# Altium PCB PCB2.FINAL.PcbDoc (part 1 of 2)
Units mm, origin at the board's own origin, x right, y up, seen from the top; angles counter-clockwise.
Board outline 120.4 x 83.82 mm, 2 copper layers (Top Layer, Bottom Layer); 48 components, 74 nets, 339 pads, 24 vias.
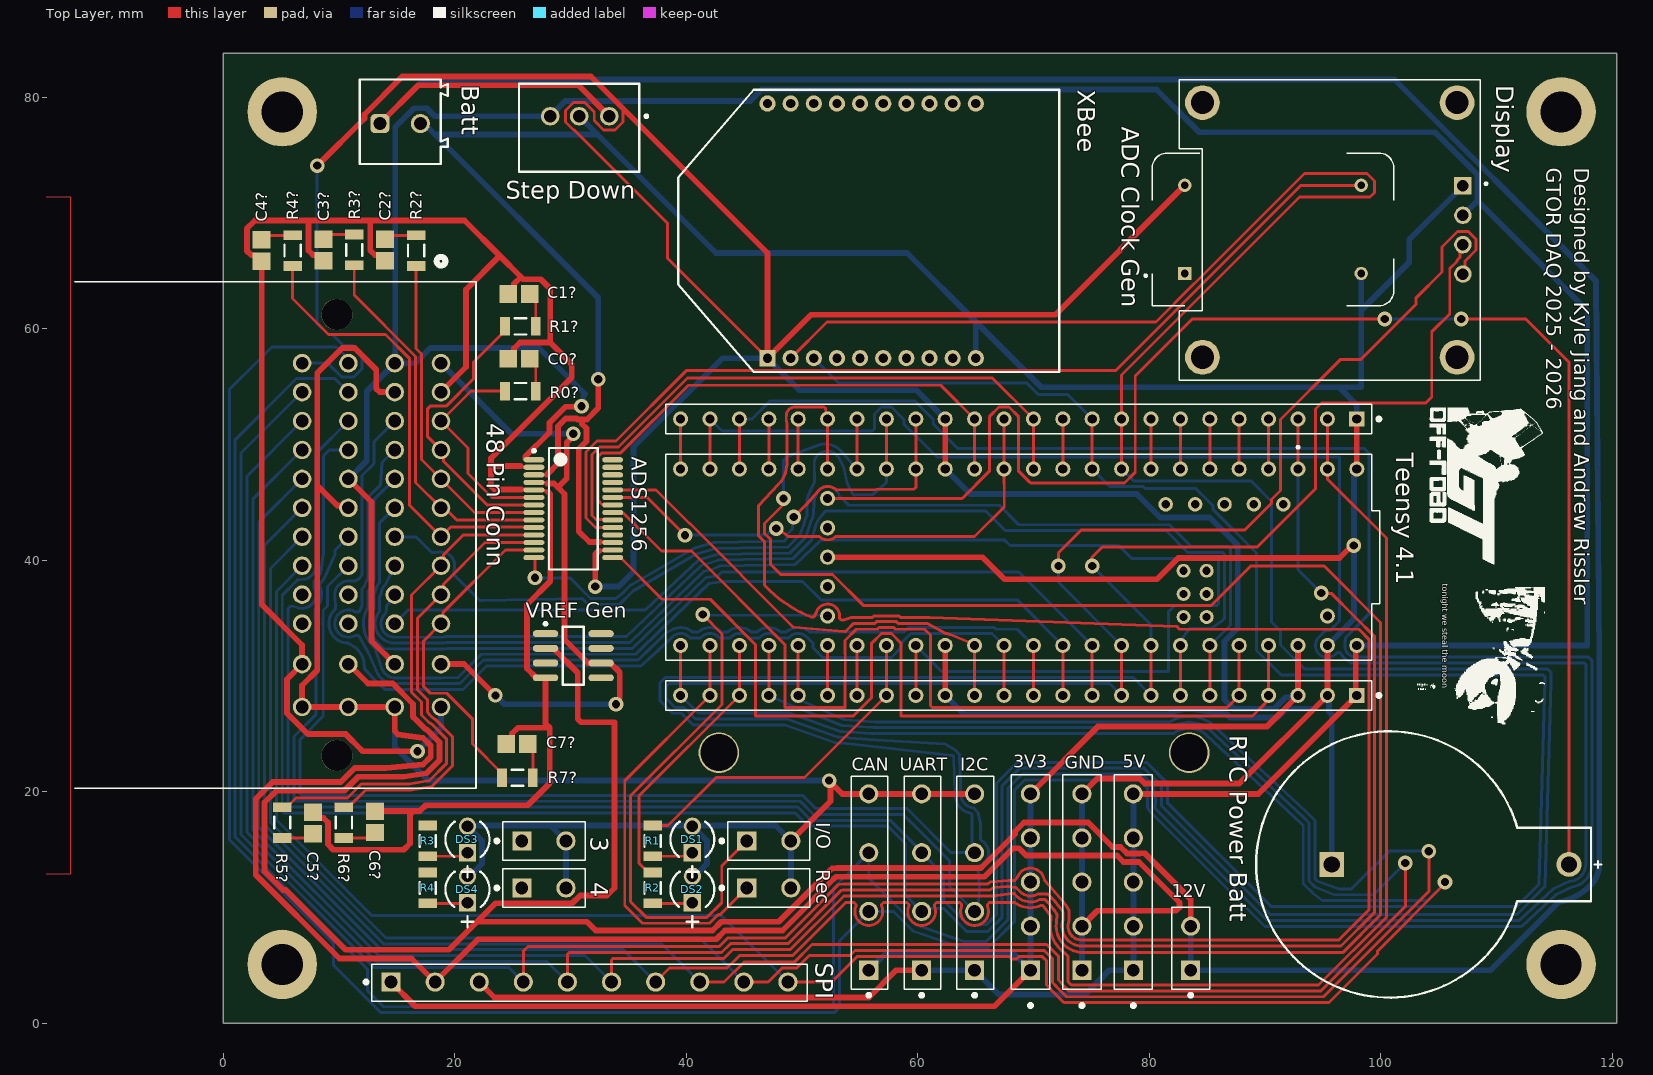
[diagram p0: Top Layer view]
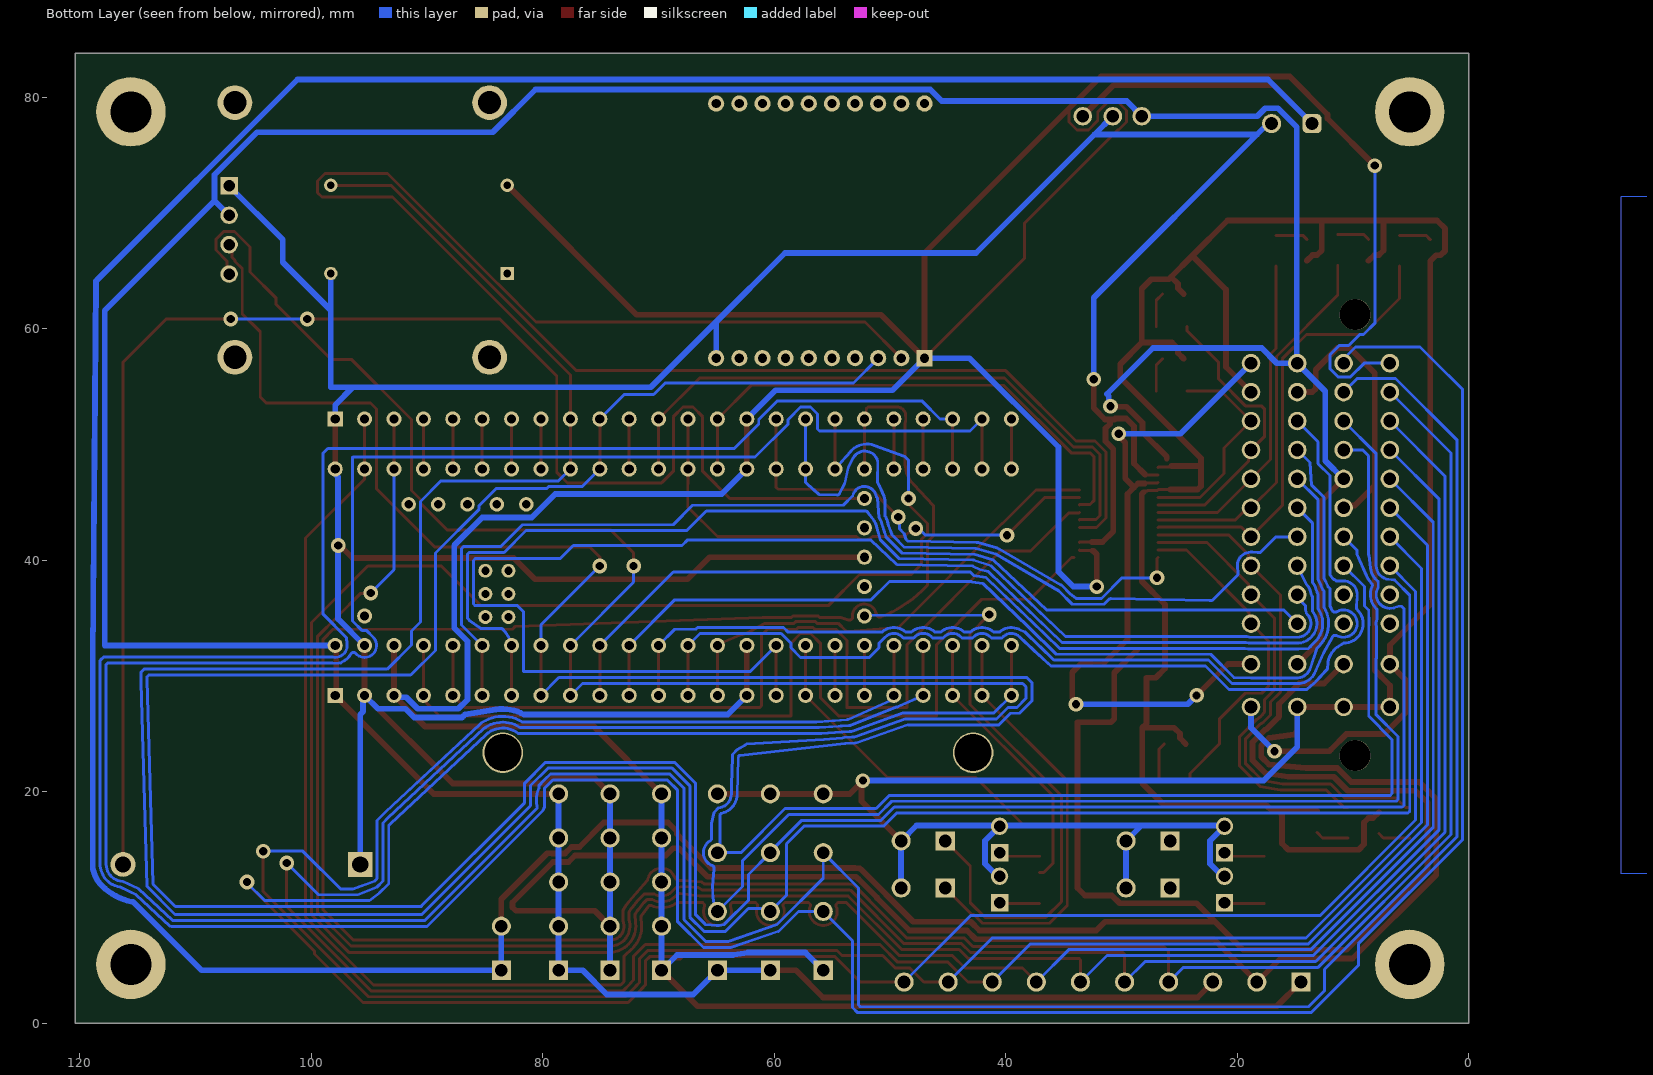
[diagram p1: Bottom Layer view, seen from below]

## Layer stack, top to bottom
Top Solder: solder mask 0.0102, Solder Resist, Dk 3.5
Top Layer: signal copper 0.0356
Dielectric 1: dielectric 0.32, FR-4, Dk 4.8
Bottom Layer: signal copper 0.0356
Bottom Solder: solder mask 0.0102, Solder Resist, Dk 3.5

## Board outline
0,0 0,83.82 120.396,83.82 120.396,0

## Design rules (kind name [scope] priority, off if disabled: settings)
Clearance [All] p1: gap=0.254 ignorepadtopadclearanceinfootprint=FALSE
ComponentClearance Ignore_48pin_Collision [InComponent('48 Pin Conn') And OnLayer('Top Layer')] p1: gap=0 collisioncheckmode=3 verticalgap=0 showdistances=FALSE donotcheckwithout3dbody=TRUE
ComponentClearance Ignore_OLED_Collision [HasFootprint('MODULE_DM-OLED096-636') vs HasFootprint('OSC_ECS-100AX-500')] p2: gap=0 collisioncheckmode=3 verticalgap=0 showdistances=FALSE donotcheckwithout3dbody=TRUE
ComponentClearance [All] p3: gap=0.254 collisioncheckmode=3 verticalgap=0.254 showdistances=FALSE
HoleSize [All] p1: absolutevalues=TRUE maxlimit=3.6 minlimit=0.025 maxpercent=80.000 minpercent=20.000
PolygonConnect [All] p1: connectstyle=Relief reliefconductorwidth=0.254 reliefentries=4 polygonreliefangle="90 Angle" airgapwidth=0.254
RoutingVias [All] p1: holewidth=0.711 width=1.27 viastyle="Through Hole" minholewidth=0.711 minwidth=1.27 maxholewidth=0.711 maxwidth=1.27
SolderMaskExpansion [All] p1: expansion=0.102 istentingtop=FALSE
SupplyNets "Schematic Supply Nets" [InNet('GND')] p1: voltage=0.000
Width [All] p1: maxlimit=0.5 minlimit=0.254 preferedwidth=0.254 minimp=50.000000 maximp=50.000000 favimp=50.000000
28 further rules are at their usual default settings.

## Classes and differential pairs
component class MainSchematic.2: "ADC Clock Gen" ADS1256 "RTC power batt" "Step Down" "Teensy 4.1" "VREF Gen" XBee
component class Filters.2: C0? C1? C2? C3? C4? C5? C6? C7? R0? R1? R2? R3? R4? R5? R6? R7?
component class 48PinConnector: 3 3V3 4 5V 12V "48 Pin Conn" Batt CAN Display DS1 DS2 DS3 DS4 GND I2C I/O R1 R2 R3 R4 Rec SPI UART

## Components (designator, comment, footprint, x,y, rotation, side; value= is the part's Value field where it differs from the comment)
1 "282837-4" TE_282837-4#1 97.917,28.321 r180 top
2 "282837-4" TE_282837-4#1 97.917,52.197 r180 top
3 "282837-4" TE_282837-4#2 25.781,15.748 r0 top (schematic designator "Btn 3")
3V3 "282837-4" TE_282837-4#3 69.723,4.572 r90 top
4 "282837-4" TE_282837-4#2 25.781,11.684 r0 top (schematic designator "Btn 4")
5V "282837-4" TE_282837-4#3 78.613,4.572 r90 top
12V "282837-4" TE_282837-4#2 83.566,4.572 r90 top
"48 Pin Conn" "366380003" CONN_36638-0003_MOL 18.796,57.023 r270 top (schematic designator J?)
"ADC Clock Gen" "MCO-1510A" OSC_ECS-100AX-500 90.678,68.58 r0 top (schematic designator "ADC Clock Generator")
ADS1256 "ADS1256IDBTG4" TI-DB28_L 30.226,44.45 r0 top
Batt "691214110002S" 691214110002S 15.268,77.874 r0 top
C0? "VJ0805Y682KXAMT" CAPC2013X145X48ML20T23 25.527,57.404 r0 top
C1? "VJ0805Y682KXAMT" CAPC2013X145X48ML20T23 25.527,62.992 r0 top
C2? "VJ0805Y682KXAMT" CAPC2013X145X48ML20T23 13.97,66.802 r90 top
C3? "VJ0805Y682KXAMT" CAPC2013X145X48ML20T23 8.636,66.802 r90 top
C4? "VJ0805Y682KXAMT" CAPC2013X145X48ML20T23 3.302,66.766 r90 top
C5? "VJ0805Y682KXAMT" CAPC2013X145X48ML20T23 7.747,17.308 r270 top
C6? "VJ0805Y682KXAMT" CAPC2013X145X48ML20T23 13.081,17.399 r270 top
C7? "VJ0805Y682KXAMT" CAPC2013X145X48ML20T23 25.364,24.13 r0 top
CAN "282837-4" TE_282837-4#4 55.753,4.572 r90 top
Display "DM-OLED096-636" MODULE_DM-OLED096-636 95.582,68.531 r270 top
DS1 "304090041" LED-2P-2.28-3MM_A 40.513,15.875 r90 top
DS2 "304090041" LED-2P-2.28-3MM_A 40.513,11.557 r90 top
DS3 "304090041" LED-2P-2.28-3MM_A 21.082,15.875 r90 top
DS4 "304090041" LED-2P-2.28-3MM_A 21.082,11.557 r90 top
GND "282837-4" TE_282837-4#3 74.168,4.572 r90 top
I2C "282837-4" TE_282837-4#4 64.897,4.572 r90 top
I/O "282837-4" TE_282837-4#2 45.212,15.748 r0 top
R0? "RC1206FR-10750RL" RESC3116X65X40LL10T20 25.654,54.61 r0 top
R1 "RC1206FR-10750RL" RESC3116X65X40LL10T20 37.084,15.748 r270 top
R1? "RC1206FR-10750RL" RESC3116X65X40LL10T20 25.654,60.198 r0 top
R2 "RC1206FR-10750RL" RESC3116X65X40LL10T20 37.084,11.684 r270 top
R2? "RC1206FR-10750RL" RESC3116X65X40LL10T20 16.637,66.747 r90 top
R3 "RC1206FR-10750RL" RESC3116X65X40LL10T20 17.653,15.748 r270 top
R3? "RC1206FR-10750RL" RESC3116X65X40LL10T20 11.303,66.802 r90 top
R4 "RC1206FR-10750RL" RESC3116X65X40LL10T20 17.653,11.684 r270 top
R4? "RC1206FR-10750RL" RESC3116X65X40LL10T20 5.969,66.747 r90 top
R5? "RC1206FR-10750RL" RESC3116X65X40LL10T20 5.08,17.327 r270 top
R6? "RC1206FR-10750RL" RESC3116X65X40LL10T20 10.414,17.327 r270 top
R7? "RC1206FR-10750RL" RESC3116X65X40LL10T20 25.4,21.209 r0 top
Rec "282837-4" TE_282837-4#2 45.212,11.684 r0 top
"RTC Power Batt" "101" FP-101-MFG 103.683,13.716 r0 top (schematic designator "RTC power batt")
SPI "282837-4" TE_282837-4#5 14.478,3.556 r0 top (schematic designator J?)
"Step Down" "OKI-78SR-5/1.5-W36-C" MURA-OKI-78SR-3 30.734,78.359 r180 top (schematic designator "Step Down Circuit")
"Teensy 4.1" "DEV-16771" MODULE_DEV-16771 68.707,40.259 r180 top
UART "282837-4" TE_282837-4#4 60.325,4.572 r90 top
"VREF Gen" "ADR4550ARZ" ADI-R-8_N 30.226,31.75 r0 top (schematic designator "Analog VREF Generator")
XBee "XBP9B-DPST-001" DIP2200W51P200L3294H279Q20P 55.753,68.453 r90 top

## Footprints (in the part's own frame and the unit in brackets; to place one, negate y for a bottom-side part, rotate by r counter-clockwise, add the part's x,y. Pads: shape width x height; smd on the part's side, far side on the other; paste and mask are expansions set on the pad)
691214110002S [mm]
  rrect50% 1.65x1.65 hole 1.1: 1(-1.75,-0.15)
  round 1.65 hole 1.1: 2(1.75,-0.15)
  silkscreen extent -3.5,-3.65 4.1,3.65, body extent -3.5,-3.65 4.1,3.65, height 9.15
ADI-R-8_N [mm] "SOIC, 8-Leads, Body 4.9x3.9mm, Pitch 1.27mm, IPC Medium Density"
  oval 2.2x0.6 smd: 1(-2.4,1.905) 2(-2.4,0.635) 3(-2.4,-0.635) 4(-2.4,-1.905) 5(2.4,-1.905) 6(2.4,-0.635) 7(2.4,0.635) 8(2.4,1.905)
  silkscreen extent -2.52,-2.5 0.9,2.88, body extent -2,-2.5 2,2.5, height 1.75
CAPC2013X145X48ML20T23 [mm] "Chip Capacitor, 2-Leads, Body 2.00x1.25mm, IPC Low Density"
  rect 1.5x1.55 smd: 1(-0.925,0) 2(0.925,0)
  body extent -1.1,-0.72 1.1,0.72, height 1.45
CONN_36638-0003_MOL [mil]
  round 63 / inner round 60 / far side round 63 hole 43 paste-99999 mask+0: A1(0,0) A2(0,-157.48) A3(0,-314.96) A4(0,-472.44) B1(98.43,0) B2(98.43,-157.48) B3(98.43,-314.96) B4(98.43,-472.44) C1(196.85,0) C2(196.85,-157.48) C3(196.85,-314.96) C4(196.85,-472.44) D1(295.28,0) D2(295.28,-157.48) D3(295.28,-314.96) D4(295.28,-472.44) E1(393.7,0) E2(393.7,-157.48) E3(393.7,-314.96) E4(393.7,-472.44) F1(492.13,0) F2(492.13,-157.48) F3(492.13,-314.96) F4(492.13,-472.44) G1(590.55,0) G2(590.55,-157.48) G3(590.55,-314.96) G4(590.55,-472.44) H1(688.98,0) H2(688.98,-157.48) H3(688.98,-314.96) H4(688.98,-472.44) J1(787.4,0) J2(787.4,-157.48) J3(787.4,-314.96) J4(787.4,-472.44) K1(885.83,0) K2(885.83,-157.48) K3(885.83,-314.96) K4(885.83,-472.44) L1(1023.62,0) L2(1023.62,-157.48) L3(1023.62,-314.96) L4(1023.62,-472.44) M1(1169.29,0) M2(1169.29,-157.48) M3(1169.29,-314.96) M4(1169.29,-472.44)
  round 106 / inner round 60 / far side round 106 hole 106 unplated paste-99999 mask+0: MOUNT1(-165.35,-354.33) MOUNT2(1334.65,-354.33)
  Multi-Layer lines w1: 1441.15,-2098.83 1441.15,-1377.9 1736.15,-1377.9 1736.15,-1259.9 -566.85,-1259.9 -566.85,-1377.9 -271.85,-1377.9 -271.85,-2098.83 1441.15,-2098.83
  silkscreen extent -362,-1245 1446,119
DIP2200W51P200L3294H279Q20P [mm]
  rect 1.4x1.4 / inner round 1.4 / far side rect 1.4x1.4 hole 0.8 mask+0.102: 1(-11,8.75)
  round 1.4 hole 0.8 mask+0.102: 2(-11,6.75) 3(-11,4.75) 4(-11,2.75) 5(-11,0.75) 6(-11,-1.25) 7(-11,-3.25) 8(-11,-5.25) 9(-11,-7.25) 10(-11,-9.25) 11(11,-9.25) 12(11,-7.25) 13(11,-5.25) 14(11,-3.25) 15(11,-1.25) 16(11,0.75) 17(11,2.75) 18(11,4.75) 19(11,6.75) 20(11,8.75)
  silkscreen extent -12.19,-16.47 12.19,16.47, body extent -12.19,-16.47 12.19,29.17, height 7.67
FP-101-MFG [mm]
  rect 2.145x2.145 hole 1.395 paste-2539.97 mask+0: 1(-7.925,0)
  round 2.145 hole 1.395 paste-2539.97 mask+0: 2(12.565,0)
  silkscreen extent -14.46,-11.5 15.37,11.5, body extent -14.57,-11.61 14.57,11.61, height 0.25
LED-2P-2.28-3MM_A [mm] "LED, 2-Leads, Dia 3mm, Pitch 2.28mm"
  rect 1.5x1.5 hole 1: 1(-1.14,0)
  round 1.5 hole 1: 2(1.14,0)
  silkscreen extent -3.29,-1.9 1.52,1.9, body extent -1.9,-1.91 1.52,1.91, height 5.3
MODULE_DEV-16771 [mm]
  round 1.308 hole 0.8: 0(-26.67,-7.62) 1(-24.13,-7.62) 2(-21.59,-7.62) 3(-19.05,-7.62) 3.3V_1(6.35,-7.62) 3.3V_2(-24.13,7.62) 3.3V_3(16.51,-2.54) 4(-16.51,-7.62) 5(-13.97,-7.62) 6(-11.43,-7.62) 7(-8.89,-7.62) 8(-6.35,-7.62) 9(-3.81,-7.62) 10(-1.27,-7.62) 11(1.27,-7.62) 12(3.81,-7.62) 13(3.81,7.62) 14(1.27,7.62) 15(-1.27,7.62) 16(-3.81,7.62) 17(-6.35,7.62) 18(-8.89,7.62) 19(-11.43,7.62) 20(-13.97,7.62) 21(-16.51,7.62) 22(-19.05,7.62) 23(-21.59,7.62) 24(8.89,-7.62) 25(11.43,-7.62) 26(13.97,-7.62) 27(16.51,-7.62) 28(19.05,-7.62) 29(21.59,-7.62) 30(24.13,-7.62) 31(26.67,-7.62) 32(29.21,-7.62) 33(29.21,7.62) 34(26.67,7.62) 35(24.13,7.62) 36(21.59,7.62) 37(19.05,7.62) 38(16.51,7.62) 39(13.97,7.62) 40(11.43,7.62) 41(8.89,7.62) GND1(-29.21,-7.62) GND2(6.35,7.62) GND3(-26.67,7.62) GND4(16.51,0) ON/OFF(16.51,5.08) PROGRAM(16.51,2.54) VBAT(16.51,-5.08) VIN(-29.21,7.62) VUSB(-26.67,5.08)
  round 1.258 hole 0.75: 5V(-22.86,-4.57) D+(-17.78,-4.57) D-(-20.32,-4.57) USB_GND1(-15.24,-4.57) USB_GND2(-12.7,-4.57)
  round 1.208 hole 0.7: GND5(-14.24,3.17) LED(-16.24,3.17) R+(-16.24,5.17) R-(-14.24,5.17) T+(-14.24,1.17) T-(-16.24,1.17)
  silkscreen extent -31.18,-9.6 30.48,8.89, body extent -31.18,-8.89 30.48,8.89, height 7.15
MODULE_DM-OLED096-636 [mm]
  rect 1.508x1.508 / inner round 1.508 / far side rect 1.508x1.508 hole 1: 1(-3.81,11.5)
  round 1.508 hole 1: 2(-1.27,11.5) 3(1.27,11.5) 4(3.81,11.5)
  round 3 hole 2: S1(-11,11) S2(11,11) S3(11,-11) S4(-11,-11)
  silkscreen extent -13,-13 13,13.6
MURA-OKI-78SR-3 [mm] "THMT, 3-Leads, Body 10.4x7.6mm"
  round 1.6 hole 1.1: 1(-2.6,0) 2(0,0) 3(2.5,0)
  silkscreen extent -5.92,-2.8 5.2,4.8, body extent -5.2,-2.8 5.2,4.8, height 16.5
OSC_ECS-100AX-500 [mm]
  rect 1.158x1.158 hole 0.65: 1(-7.62,-3.81)
  round 1.158 hole 0.65: 7(7.62,-3.81) 8(7.62,3.81) 14(-7.62,3.81)
  silkscreen extent -11.1,-6.6 10.43,6.6
RESC3116X65X40LL10T20 [mm] "Chip Resistor, 2-Leads, Body 3.10x1.60mm, IPC High Density"
  rect 0.85x1.6 smd: 1(-1.325,0) 2(1.325,0)
  silkscreen extent -0.5,-0.7 0.5,0.7, body extent -1.6,-0.85 1.6,0.85, height 0.65
TE_282837-4#1 [mm]
  rect 1.308x1.308 / inner round 1.308 / far side rect 1.308x1.308 hole 0.8: 1(0,0)
  round 1.308 hole 0.8: 2(2.54,0) 3(5.08,0) 4(7.62,0) 5(10.16,0) 6(12.7,0) 7(15.24,0) 8(17.78,0) 9(20.32,0) 10(22.86,0) 11(25.4,0) 12(27.94,0) 13(30.48,0) 14(33.02,0) 15(35.56,0) 16(38.1,0) 17(40.64,0) 18(43.18,0) 19(45.72,0) 20(48.26,0) 21(50.8,0) 22(53.34,0) 23(55.88,0) 24(58.42,0)
  silkscreen extent -2.05,-1.27 59.69,1.27
TE_282837-4#2 [mm]
  rect 1.65x1.65 / inner round 1.65 / far side rect 1.65x1.65 hole 1.1: 1(0,0)
  round 1.65 hole 1.1: 2(3.81,0)
  silkscreen extent -2.31,-1.65 5.46,1.65
TE_282837-4#3 [mm]
  rect 1.65x1.65 / inner round 1.65 / far side rect 1.65x1.65 hole 1.1: 1(0,0)
  round 1.65 hole 1.1: 2(3.81,0) 3(7.62,0) 4(11.43,0) 5(15.24,0)
  silkscreen extent -3.2,-1.65 16.89,1.65
TE_282837-4#4 [mm]
  rect 1.65x1.65 / inner round 1.65 / far side rect 1.65x1.65 hole 1.1: 1(0,0)
  round 1.65 hole 1.1: 2(5.08,0) 3(10.16,0) 4(15.24,0)
  silkscreen extent -2.31,-1.65 16.76,1.52, body extent -1.65,-1.65 16.76,1.52, height 0.25
TE_282837-4#5 [mm]
  rect 1.65x1.65 / inner round 1.65 / far side rect 1.65x1.65 hole 1.1: 1(0,0)
  round 1.65 hole 1.1: 2(3.81,0) 3(7.62,0) 4(11.43,0) 5(15.24,0) 6(19.05,0) 7(22.86,0) 8(26.67,0) 9(30.48,0) 10(34.29,0)
  silkscreen extent -2.31,-1.65 35.94,1.52
TI-DB28_L [mm] "SOP, 28-Leads, Body 10.2x5.3mm, Pitch 0.65mm, IPC High Density"
  oval 1.8x0.45 smd: 1(-3.4,4.225) 2(-3.4,3.575) 3(-3.4,2.925) 4(-3.4,2.275) 5(-3.4,1.625) 6(-3.4,0.975) 7(-3.4,0.325) 8(-3.4,-0.325) 9(-3.4,-0.975) 10(-3.4,-1.625) 11(-3.4,-2.275) 12(-3.4,-2.925) 13(-3.4,-3.575) 14(-3.4,-4.225) 15(3.4,-4.225) 16(3.4,-3.575) 17(3.4,-2.925) 18(3.4,-2.275) 19(3.4,-1.625) 20(3.4,-0.975) 21(3.4,-0.325) 22(3.4,0.325) 23(3.4,0.975) 24(3.4,1.625) 25(3.4,2.275) 26(3.4,2.925) 27(3.4,3.575) 28(3.4,4.225)
  silkscreen extent -3.52,-5.25 2.1,5.25, body extent -2.8,-5.25 2.8,5.25, height 2

## Part data
1 2 3 3V3 4 5V 12V CAN GND I2C I/O Rec SPI UART: "4 Position Wire to Board Terminal Block Horizontal with Board 0.200 (5.08mm) Through Hole", Package=None, Availability="In Stock", Check_prices=https://www.snapeda.com/parts/282837-4/TE+Connectivity+AMP+Connectors/view-part/?ref=eda, EU_RoHS_Compliance="Compliant with Exemptions", MF="TE Connectivity", MP=282837-4, Price=None, Purchase-URL=https://pricing.snapeda.com/search/part/282837-4/?ref=eda, SnapEDA_Link=https://www.snapeda.com/parts/282837-4/TE+Connectivity+AMP+Connectors/view-part/?ref=snap
"48 Pin Conn": "2.50mm, 3.50mm CMC Header, Right-Angle, 48 Position, 1 Port, Brown, Peg,  Lead-Free", Manufacturer_Name="Molex Connector Corporation", Copyright="Copyright (C) 2025 Ultra Librarian. All rights reserved.", Manufacturer_Part_Number=366380003, RefDes=RefDes, Type=Type
"ADC Clock Gen": library part ECS-100AX-500, "Oscillator  14-DIP, 4 Leads (Full Size, Metal Can)", Package=None, Availability=Unavailable, MP=ECS-100AX-500, Price=None
ADS1256: library part CMP-0003-00153-1, "24-Bit, 30 kSPS Very Low Noise Delta-Sigma ADC with Multiplexer, -40 to 85 degC, 28-pin SOP (DB28), Green (RoHS & no Sb/Br)", Analog Voltage AV/DD(Max)(V)=5.25, Analog Voltage AV/DD(Min)(V)=4.75, Manufacturer="Texas Instruments", # Input Channels=8, Architecture=Delta-Sigma, Code_JEDEC=MO-150, ComponentLink1Description="Manufacturer URL", ComponentLink1URL=http://www.ti.com/, ComponentLink2Description=Datasheet, ComponentLink2URL=http://www.ti.com/general/docs/lit/getliterature.tsp?genericPartNumber=ADS1256&fileType=pdf, ComponentLink3Description="Package Specification", ComponentLink3URL=http://www.ti.com/lit/ml/msso002e/msso002e.pdf, DatasheetVersion=SBAS288J, Digital Supply(Max)(V)=3.6, Digital Supply(Min)(V)=1.8, Eco-Plan="Green (RoHS & no Sb/Br)", Interface="Serial SPI", Mounting Technology="Surface Mount", PackageDescription="28-Pin Plastic Small Outline, Body 10.2 X 5.3 mm, Pitch 0.65 mm", PackageReference=DB28, PackageVersion="4040065/E, 12/2001", PartNumber=ADS1256IDBTG4, Resolution(Bits)=24, Sample Rate (max)(SPS)=30k, SubFamily="Precision ADC (<=10MSPS)"
Batt: library part CMP-1502-02465-2, Current Rating=10A, Max Operating Temperature=120°C, Min Operating Temperature=-30°C, Voltage Rating=300V, Contact Material="Nickel, Tin", Height=9.2mm, Lead Pitch=3.5mm, NexarPartId=94172715, Number of Contacts=2, Number of Pins=2, Number of Rows=1, Packaging=Box
C0? C1? C2? C3? C4? C5? C6? C7?: library part CMP-2007-03205-1, Manufacturer=Vitramon, Part Number=VJ0805Y682KXAMT
Display: "0.96â€ 128 X 64 MONOCHROME GRAPHIC OLED DISPLAY MODULE - I2C", Package=Package, Check_prices=https://www.snapeda.com/parts/DM-OLED096-636/Display+Module/view-part/?ref=eda, MF="Display Module", MP=DM-OLED096-636, SnapEDA_Link=https://www.snapeda.com/parts/DM-OLED096-636/Display+Module/view-part/?ref=snap
DS1 DS2 DS3 DS4: library part CMP-007-00007-2, "Red LED, 80 mW, 30 mA, -25 to 85 degC, 2-Pin THD", Manufacturer="Shenzhen CGX", Package Description="2-Pin Through Hole Device, Dia 3 mm, Pitch 2.28 mm", Case/Package=304090041, Datasheet URL=http://datasheet.octopart.com/304090041-Chengguangxing-datasheet-62330656.pdf, Datasheet Version=Sep-14, Manufacturer URL=http://szcgx.com/, Mounting Technology=TH, Package Reference=304090041, RoHS Compliant=Unknown
R0? R1 R1? R2 R2? R3 R3? R4 R4? R5? R6? R7?: library part CMP-2003-04964-1, Manufacturer=Yageo, Part Number=RC1206FR-10750RL
"RTC Power Batt": library part CMP-19636-000018-1, "BATTERY HOLDER COIN 20MM PC PIN", Max Operating Temperature=145°C, Min Operating Temperature=-50°C, Package Quantity=1, Body Material=PBT, Contact Plating=Tin, Lead Free="Lead Free", Material=Steel, Mount="Through Hole", Number of Batteries=1, Number of Cells=1, Packaging=Bag, REACH SVHC="No SVHC", series=-, Termination="PC Pin"
"Step Down": library part CMP-2000-05274-1, "Non-Isolated DC/DC Converter, 7.5 W, 7 to 36 V, 1.5 A, -40 to 85 degC, 3-Pin THD, RoHS", Current - Output (Max)=1.5A, Manufacturer=Murata, Operating Temperature=-40degC~85degC, Package / Case=3-SIPModule, Power (Watts) - Manufacture Series=8W, Voltage - Input (Max)=36V, Voltage - Input (Min)=7V, Voltage - Isolation=-, Voltage - Output 1=5V, Applications=ITE(Commercial), Category=PowerSupplies-BoardMount, Datasheet URL=https://datasheet.ciiva.com/8006/1790439-8006672.pdf, Datasheet Version=Oct-13, Efficiency=90.5%, Family=DCDCConverters, Features=SCP, Manufacturer URL=http://www.murata.com/, Mounting Type=ThroughHole, Number of Outputs=1, Packaging=Tube, Power (Watts) - Max=8W, series=Okami™OKI-78SR, Size / Dimension="0.41\"Lx0.30\"Wx0.65\"H(10.4mmx7.6mmx16.5mm)", Type=LinearRegulatorReplacement, Voltage - Output 2=-, Voltage - Output 3=-
"Teensy 4.1": library part CMP-003-000000-1, "RT1062 Teensy 4.1 series ARM?Cortex?M7 MPU Embedded Evaluation Board", Package=None, Check_prices=https://www.snapeda.com/parts/DEV-16771/SparkFun+Electronics/view-part/?ref=eda, MF="SparkFun Electronics", MP=DEV-16771, SnapEDA_Link=https://www.snapeda.com/parts/DEV-16771/SparkFun+Electronics/view-part/?ref=snap
"VREF Gen": library part CMP-0784-00194-1, "Ultralow Noise, High Accuracy Voltage Reference, 5 V Output, 3 to 15 V Supply, Industrial, 8-pin SOIC (R-8), Tube", Manufacturer="Analog Devices", Operating Temp Range="-40 to 125 degC", Code_JEDEC=MS-012-AA, ComponentLink1Description="Manufacturer URL", ComponentLink1URL=http://www.analog.com/en/index.html, ComponentLink2Description=Datasheet, ComponentLink2URL=http://www.analog.com/static/imported-files/data_sheets/ADR4520_4525_4530_4533_4540_4550.pdf, ComponentLink3Description="Package Specification", ComponentLink3URL=http://www.analog.com/static/imported-files/packages/PKG_PDF/SOIC_Narrow%20(R)/R_8.pdf, ComponentLink4Description="URL Link1", ComponentLink4URL="Product URL:http://www.analog.com/en/special-linear-functions/voltage-references/adr4550/products/product.html", DatasheetVersion="Rev. 0", Max V Supply (V)=15, Min V Supply (V)=3, Mounting Technology="Surface Mount", PackageDescription="8-Pin Standard Small Outline Package, Body 4.9 x 3.9 mm, Pitch 1.27 mm", PackageReference=R-8, PackageVersion="060506-A, 06/2006", Packing=Tube, PartNumber=ADR4550ARZ, Ref Out TC (ppm/C)=4, Vout=5V
XBee: "General ISM < 1GHz - Transceiver Module 900MHz Antenna Not Included, RP-SMA Through Hole", Package="Module Digi International", Check_prices=https://www.snapeda.com/parts/XBP9B-DPST-001/Digi+International/view-part/?ref=eda, MF="Digi International", MP=XBP9B-DPST-001, SnapEDA_Link=https://www.snapeda.com/parts/XBP9B-DPST-001/Digi+International/view-part/?ref=snap

## Free pads (board coordinates)
  round 6 hole 3.55: 6(5.08,78.74) 7(5.08,5.08) 8(115.57,78.74) 9(115.57,5.08)
  round 3.5 hole 3.2: 13(42.799,23.368) 14(83.439,23.368)

## Via types
v1: diameter 1.27, hole 0.711, Top Layer to Bottom Layer, 24 vias

## Nets (pads, with @x,y where several pads share a name; then routed paths per layer and width w, separated by ;. In a path a pad name is that pad's centre, name@x,y a point inside that pad or via, vN(x,y) a via of type N, cw(c..) or ccw(c..) an arc to the next point about the centre after c; other vN are vias at no path point)
GND: 1.2 1.15 2.1 3.2 4.2 "48 Pin Conn.B2" "48 Pin Conn.F3" "48 Pin Conn.M2" "48 Pin Conn.M3" "48 Pin Conn.M4" "ADC Clock Gen.7" "RTC Power Batt.1" "Step Down.2" "Teensy 4.1.GND1" "Teensy 4.1.GND2" "Teensy 4.1.GND3" "Teensy 4.1.GND4" ADS1256.3 ADS1256.17 Batt.2 CAN.4 Display.1 DS1.2 DS2.2 DS3.2 DS4.2 GND.1 GND.2 GND.3 GND.4 GND.5 I2C.4 I/O.2 Rec.2 SPI.2 UART.4 XBee.10 | length 634.8
  Top Layer w0.254: ADS1256.3@26.826,47.375 27.94,47.375 ; 32.533,41.562 33.588,41.562 ADS1256.17@33.626,41.525
  Top Layer w0.5: 10.796,44.523 10.586,44.734 9.83,44.734 8.1,46.464 ; 14.796,54.523 13.501,54.523 13.208,54.816 13.208,56.455 11.336,58.327 10.256,58.327 8.1,56.171 8.1,46.464 ; 27.94,47.375 28.915,48.35 28.915,51.571 29.582,52.238 30.525,52.238 30.599,52.165 30.988,52.165 ; v1(32.385,55.626) 32.385,53.149 31.401,52.165 30.988,52.165 ; 32.533,41.562 31.62,41.562 30.698,42.485 30.698,49.608 31.365,50.275 31.365,51.399 30.988,51.776 30.988,52.165 ; I/O.2@49.022,15.748 52.451,19.177 52.451,20.832 v1(52.326,20.957) 53.471,19.812 CAN.4@55.753,19.812 UART.4@60.325,19.812 I2C.4@64.897,19.812 ; 52.197,40.259 65.582,40.259 67.483,38.358 80.649,38.358 82.488,40.197 96.429,40.197 97.507,41.275 v1(97.663,41.275) ; 1.15@62.357,28.321 62.357,32.639 ; GND.2@74.168,8.382 75.497,9.711 82.299,9.711 82.592,10.004 82.592,10.418 79.091,13.919 77.75,13.919 77.191,14.478 69.368,14.478 68.733,15.113 68.224,15.113 65.907,12.796 65.76,12.649 53.338,12.649 53.323,12.648 52.925,12.624 52.893,12.609 52.71,12.455 51.105,10.849 51.105,10.821 48.293,8.009 43.325,8.009 42.567,7.251 21.983,7.251 SPI.2@18.288,3.556 16.248,5.596 10.025,5.596 2.794,12.827 2.794,19.37 4.267,20.843 10.133,20.843 11.337,22.048 14.054,22.048 17.236,22.356 17.903,23.023 17.903,23.967 17.236,24.634 15.09,24.951 14.796,25.244 14.796,27.323 10.796,27.323 6.796,27.323 6.796,29.179 8.1,30.483 8.1,46.464 ; GND.5@74.168,19.812 75.497,21.141 79.163,21.141 79.603,20.701 87.757,20.701 1.2@95.377,28.321 95.377,32.639 ; 97.917,47.879 2.1@97.917,52.197
  Bottom Layer w0.5: 14.796,27.323 14.796,23.852 17.691,20.957 v1(52.326,20.957) v1@52.326,21.114 ; Batt.2@17.018,77.724 17.329,77.724 18.282,76.772 ; DS4.2@21.082,12.697 21.257,12.697 22.336,13.776 22.336,15.761 DS3.2@21.082,17.015 ; DS3.2@21.145,16.952 21.271,17.077 28.262,17.077 ; 4.2@29.591,11.684 3.2@29.591,15.748 28.262,17.077 ; 30.734,78.359 32.322,76.772 ; v1(32.385,55.626) 32.385,62.668 18.282,76.772 ; DS1.2@40.45,16.952 40.324,17.077 28.262,17.077 ; DS2.2@40.513,12.697 40.688,12.697 41.767,13.776 41.767,15.761 DS1.2@40.513,17.015 ; DS1.2@40.702,17.077 47.693,17.077 I/O.2@49.022,15.748 Rec.2@49.022,11.684 ; 1.15@62.357,28.321 63.862,26.816 64.008,26.67 81.603,26.67 cw(c83.439,23.368) 84.042,27.098 86.702,26.67 ccw(c86.782,27.164) 86.704,26.67 86.85,26.524 86.965,26.409 91.089,26.409 91.843,27.163 94.219,27.163 1.2@95.377,28.321 95.508,28.19 95.508,26.917 95.758,26.667 95.758,13.716 ; XBee.10@65.003,57.453 65.003,60.6 ; GND.1@74.168,4.572 GND.2@74.168,8.382 GND.3@74.168,12.192 GND.4@74.168,16.002 GND.5@74.168,19.812 ; 95.377,32.639 97.663,34.925 v1(97.663,41.275) 97.663,47.182 97.762,47.282 97.762,47.724 97.917,47.879 ; 2.1@97.917,52.197 97.917,53.417 96.393,54.941 ; 98.298,64.77 98.298,61.595 ; Display.1@107.082,72.341 102.449,67.708 102.449,65.746 98.298,61.595 ; 18.282,76.772 32.322,76.772 ; 32.322,76.772 42.548,66.545 59.058,66.545 65.003,60.6 ; 65.003,60.6 70.662,54.941 96.393,54.941 ; 96.393,54.941 98.298,54.941 98.298,61.595
Net1_1: 1.1 5V.1 5V.2 5V.3 5V.4 5V.5 "48 Pin Conn.A2" "48 Pin Conn.E3" "48 Pin Conn.L2" "Step Down.3" "Teensy 4.1.VIN" ADS1256.1 Display.2 I2C.1 SPI.3 UART.1 | length 343.8
  Top Layer w0.5: 10.796,47.023 12.796,45.023 12.796,33.023 14.796,31.023 ; SPI.3@22.098,3.556 23.427,2.227 55.771,2.227 58.116,4.572 UART.1@60.325,4.572 ; ADS1256.1@26.067,48.786 26.067,48.95 28.161,51.044 28.161,51.883 29.544,53.267 30.892,53.267 v1(30.929,53.304) ; 5V.5@78.613,19.812 89.408,19.812 1.1@97.917,28.321 97.82,28.418 97.82,32.542 97.917,32.639
  Bottom Layer w0.5: 10.796,47.023 12.373,48.6 12.373,54.6 14.796,57.023 ; v1(30.929,53.304) 31.076,53.451 31.076,54.19 31.242,54.356 27.271,58.327 17.867,58.327 16.563,57.023 14.796,57.023 ; UART.1@60.325,4.572 I2C.1@64.897,4.572 66.98,2.489 74.448,2.489 76.531,4.572 5V.1@78.613,4.572 5V.2@78.613,8.382 5V.3@78.613,12.192 5V.4@78.613,16.002 5V.5@78.613,19.812 ; 97.917,32.639 117.824,32.639 117.824,61.574 108.34,71.059 ; Display.2@107.082,69.801 108.34,71.059 ; 14.796,57.023 14.847,57.074 14.847,77.432 16.468,79.053 17.568,79.053 18.262,78.359 28.234,78.359 29.538,79.663 45.51,79.663 46.504,80.657 80.622,80.657 84.299,76.98 104.663,76.98 108.34,73.304 108.34,71.059
Net1_3: 1.3 2.15 3V3.1 3V3.2 3V3.3 3V3.4 3V3.5 "48 Pin Conn.A4" "ADC Clock Gen.14" "Teensy 4.1.3.3V_1" "Teensy 4.1.3.3V_2" ADS1256.16 CAN.1 SPI.1 XBee.1 | length 385.6
  Top Layer w0.254: 32.512,40.808 32.541,40.837 33.588,40.837 ADS1256.16@33.626,40.875 ; 34.515,78.848 34.515,77.87 33.823,77.178 32.845,77.178 32.034,77.989 32.034,78.729 31.223,79.54 30.245,79.54 29.553,78.848 29.553,77.87 30.245,77.178 30.307,77.178 38.369,69.117 38.369,66.087 XBee.1@47.003,57.453
  Top Layer w0.5: v1(8.107,74.09) 12.189,78.172 12.189,78.516 15.453,81.78 31.757,81.78 47.003,66.534 XBee.1@47.003,57.453 50.764,61.214 71.882,61.214 83.058,72.39 ; SPI.1@14.478,3.556 16.561,1.473 66.624,1.473 66.77,1.619 66.913,1.762 3V3.1@69.723,4.572 ; v1(32.131,37.719) 32.131,40.516 32.424,40.808 32.512,40.808 ; 62.357,47.879 2.15@62.357,52.197 ; 3V3.5@69.723,19.812 75.533,25.622 90.138,25.622 1.3@92.837,28.321 92.837,32.639
  Bottom Layer w0.254: 6.796,57.023 9.014,57.023 10.196,55.842 11.285,55.842 11.977,56.534 11.977,57.746 11.176,58.547 10.355,58.547 9.406,59.496 9.081,59.496 8.069,60.508 8.069,73.982 v1@8.128,74.041
  Bottom Layer w0.5: v1(32.131,37.719) 34.156,37.719 35.433,38.996 35.433,49.771 43.115,57.453 XBee.1@47.003,57.453 49.779,54.677 59.877,54.677 2.15@62.357,52.197 ; CAN.1@55.753,4.572 57.277,6.096 62.269,6.096 63.487,5.907 63.563,5.901 68.394,5.901 3V3.1@69.723,4.572 3V3.2@69.723,8.382 3V3.3@69.723,12.192 3V3.4@69.723,16.002 3V3.5@69.723,19.812 ; 62.357,47.879 64.516,45.72 78.914,45.72 80.938,43.696 85.212,43.696 87.626,41.282 87.626,34.146 86.487,33.007 86.487,27.953 87.277,27.163 90.777,27.163 91.78,28.166 92.682,28.166 1.3@92.837,28.321
Net1_4: 1.4 "Teensy 4.1.23" ADS1256.15 | length 83.1
  Top Layer w0.254: ADS1256.15@34.083,40.225 34.301,40.225 37.898,36.628 42.052,36.628 45.974,32.706 45.974,26.539 54.419,26.539 56.007,28.127 56.007,32.833 56.848,33.674 57.706,33.674 58.547,32.833 58.547,26.539 88.905,26.539 90.014,27.648 90.014,27.753 90.297,28.036 90.297,32.639
Net1_5: 1.5 "Teensy 4.1.22" ADS1256.21 | length 81.7
  Top Layer w0.254: ADS1256.21@33.626,44.125 33.663,44.087 34.546,44.087 37.846,40.787 40.433,40.787 48.514,32.706 48.514,27.286 53.721,27.286 53.702,27.305 53.702,29.962 53.721,29.981 53.721,31.877 53.702,31.896 53.702,33.068 54.67,34.036 56.492,34.036 56.638,34.182 57.916,34.182 58.062,34.036 60.579,34.036 61.087,33.528 61.087,27.435 61.236,27.286 86.722,27.286 1.5@87.757,28.321 87.757,32.639
Net1_6: 1.6 "48 Pin Conn.K2" "Teensy 4.1.21" | length 94
  Top Layer w0.254: 1.6@85.217,28.321 85.217,32.639
  Bottom Layer w0.254: 14.796,34.523 15.886,35.613 15.96,35.687 18.596,35.687 cw(c18.796,34.523) 18.996,35.687 36.327,35.687 36.428,35.687 41.058,40.026 42.465,40.461 42.643,40.512 48.975,40.64 50.313,41.979 50.552,42.695 50.607,42.867 50.72,43.265 50.729,43.287 50.791,43.442 50.837,43.528 cw(c52.197,42.799) 50.843,43.539 cw(c52.197,42.799) 50.927,43.675 51.067,45.381 51.173,45.487 cw(c52.197,45.339) 53.21,45.553 53.26,45.503 53.932,44.831 54.014,44.749 67.036,44.749 68.72,43.065 81.743,43.065 83.638,41.17 86.846,41.17 86.995,41.021 86.995,34.407 85.227,32.639 85.217,32.639
Net1_7: 1.7 "48 Pin Conn.J2" "Teensy 4.1.20" | length 97.6
  Top Layer w0.254: 1.7@82.677,28.321 82.677,32.639
  Bottom Layer w0.254: 14.796,37.023 14.796,36.791 14.077,36.072 14.077,35.76 14.024,35.484 14.009,35.404 ccw(c14.796,34.523) 14.796,33.342 18.796,33.342 ccw(c18.796,34.523) 19.165,33.401 34.816,33.401 41.26,39.518 42.72,40.003 42.804,40.005 49.185,40.132 50.821,41.768 51.203,43.087 cw(c52.197,42.799) 51.223,43.149 cw(c52.197,42.799) 51.264,43.247 cw(c52.197,42.799) 51.361,43.409 51.892,44.137 cw(c52.097,43.987) 52.097,44.241 65.854,44.241 67.538,42.557 81.424,42.557 83.319,40.662 86.338,40.662 86.487,40.513 86.487,35.024 86.487,34.978 86.338,34.829 85.355,34.104 83.512,34.104 ccw(c85.453,32.027) 83.451,34.045 83.436,34.03 ccw(c85.453,32.027) 82.677,32.639
Net1_8: 1.8 "48 Pin Conn.H3" "Teensy 4.1.19" Display.3 I2C.3 | length 229.8
  Top Layer w0.254: v1(75.057,39.497) 75.057,40.273 75.932,41.148 89.314,41.148 94.342,46.176 94.342,53.067 94.859,53.584 103.876,53.584 104.394,54.102 104.394,59.73 105.947,61.283 105.947,65.191 106.574,65.818 106.574,65.906 106.842,66.174 106.842,67.021 Display.3@107.082,67.261 ; 1.8@80.137,28.321 80.137,32.639
  Bottom Layer w0.254: 10.796,39.523 8.993,37.72 8.993,36.044 8.697,35.748 8.623,35.674 8.599,34.57 ccw(c10.796,34.523) 8.623,34.2 8.623,26.53 6.677,24.554 ccw(c6.858,24.376) 6.604,24.377 6.604,19.834 6.753,19.685 50.034,19.685 51.177,18.542 59.055,18.542 62.865,14.732 I2C.3@64.897,14.732 64.687,14.942 64.687,18.005 64.613,18.079 64.561,18.131 cw(c64.897,19.812) 63.184,19.763 63.093,22.912 63.09,23.013 62.963,23.14 53.849,24.162 52.998,24.215 52.859,24.231 48.442,25.781 40.573,25.781 39.576,26.778 38.798,26.778 37.719,27.857 37.719,29.42 38.163,29.864 78.594,29.864 1.8@80.137,28.321 ; v1(75.057,39.497) 80.137,34.417 80.137,32.639
Net1_9: 1.9 "48 Pin Conn.G3" "Teensy 4.1.18" Display.4 I2C.2 | length 242.6
  Top Layer w0.254: v1(72.136,39.497) 72.142,39.503 72.142,40.64 74.096,42.595 88.221,42.595 90.557,44.931 90.557,45.247 91.332,46.022 91.332,52.156 96.531,57.354 98.288,57.354 103.017,62.083 103.017,62.631 105.283,64.897 105.283,67.067 106.612,68.396 107.552,68.396 108.217,67.731 108.217,66.791 107.282,65.856 107.282,64.921 Display.4@107.082,64.721 ; 1.9@77.597,28.321 77.597,32.639
  Bottom Layer w0.254: 10.796,42.023 9.652,40.879 9.652,40.559 8.808,38.64 cw(c6.796,39.523) 8.381,38.002 ccw(c8.565,37.827) 8.333,37.723 cw(c6.796,37.023) 7.923,35.765 7.923,34.912 cw(c6.807,34.527) 7.966,34.298 7.966,31.524 7.977,31.512 7.977,26.646 6.096,24.765 6.096,19.326 6.245,19.177 49.824,19.177 50.967,18.034 58.729,18.034 62.727,14.035 62.727,11.822 I2C.2@64.897,9.652 65.09,9.845 ccw(c56.735,11.786) 65.173,13.326 cw(c65.423,13.37) 65.331,13.607 ccw(c64.897,14.732) 65.502,15.775 65.405,15.872 65.405,17.178 65.405,17.24 65.195,18.215 64.801,18.61 cw(c64.897,19.812) 63.691,19.786 63.674,20.588 63.605,22.978 63.598,23.223 63.196,23.625 62.459,24.047 62.376,24.13 55.698,24.515 54.104,24.654 53.955,24.668 53.256,24.71 53.085,24.723 52.927,24.778 48.682,26.289 40.784,26.289 39.787,27.286 39.008,27.286 38.227,28.067 38.227,29.061 38.522,29.356 76.562,29.356 1.9@77.597,28.321 ; v1(72.136,39.497) 72.136,38.1 77.597,32.639
Net1_10: 1.10 "48 Pin Conn.F2" "Teensy 4.1.17" | length 84.1
  Top Layer w0.254: 1.10@75.057,28.321 75.057,32.639
  Bottom Layer w0.254: 14.796,44.523 13.501,43.228 13.501,38.117 13.419,38.001 ccw(c14.796,37.023) 13.162,37.451 13.107,37.241 13.033,37.133 12.993,37.094 12.993,35.779 ccw(c14.796,34.523) 13.283,32.93 13.285,32.928 13.589,32.624 13.593,32.619 13.687,32.516 13.83,32.373 14.683,32.329 ccw(c14.796,34.523) 14.796,32.326 18.796,32.326 ccw(c18.796,34.523) 19.302,32.385 35.338,32.385 41.682,38.503 42.753,38.689 43.053,38.989 68.707,38.989 75.057,32.639
Net1_11: 1.11 "48 Pin Conn.E2" "Teensy 4.1.16" | length 86.9
  Top Layer w0.254: 1.11@72.517,28.321 72.517,32.639
  Bottom Layer w0.254: 14.796,47.023 12.993,45.22 12.993,38.327 12.834,38.012 ccw(c14.796,37.023) 12.76,37.848 12.599,37.451 12.485,37.337 12.485,35.929 ccw(c14.796,34.523) 12.908,32.586 12.912,32.582 12.914,32.58 12.917,32.577 12.93,32.564 13.081,32.413 13.677,30.646 ccw(c14.796,31.023) 14.718,29.844 ccw(c14.796,31.023) 14.796,29.842 18.796,29.842 ccw(c18.796,31.023) 18.881,29.845 18.89,29.845 20.237,29.845 20.311,29.919 22.269,31.877 35.52,31.877 35.624,31.877 37.999,34.205 38.087,34.29 41.979,38.005 42.889,38.106 42.946,38.163 50.027,38.163 51.615,36.576 68.58,36.576 72.517,32.639
Net1_12: 1.12 "48 Pin Conn.D2" "Teensy 4.1.15" | length 89.2
  Top Layer w0.254: 1.12@69.977,28.321 69.977,32.639
  Bottom Layer w0.254: 11.189,33.409 cw(c10.796,34.523) 11.353,35.565 11.446,35.515 11.656,35.515 11.738,35.596 11.793,35.667 cw(c14.796,34.523) 11.977,36.065 11.977,37.548 12.131,37.702 12.326,38.133 12.485,38.448 12.485,45.431 13.582,46.528 13.617,47.095 cw(c14.796,47.023) 13.618,47.11 13.716,48.443 13.79,48.517 14.796,49.523 ; 11.19,33.41 11.44,33.498 11.651,33.498 11.746,33.407 12.542,31.94 13.233,30.371 13.287,30.264 ccw(c14.796,31.023) 14.398,29.381 14.583,29.337 14.694,29.337 14.73,29.335 ccw(c14.796,31.023) 14.796,29.334 18.796,29.334 ccw(c18.796,31.023) 18.898,29.337 20.447,29.337 22.479,31.369 35.831,31.369 38.294,33.782 38.847,34.038 cw(c39.497,32.639) 40.534,33.782 41,33.782 cw(c42.037,32.639) 43.074,33.782 43.54,33.782 cw(c44.577,32.639) 45.614,33.782 46.08,33.782 cw(c47.117,32.639) 48.154,33.782 48.62,33.782 cw(c49.657,32.639) 50.694,33.782 58.778,33.782 59.178,34.182 66.612,34.182 66.758,34.036 68.58,34.036 69.977,32.639